# Altium PCB PCB.PcbDoc
Units mm, origin at the board's own origin, x right, y up, seen from the top; angles counter-clockwise.
Board outline 51.88 x 31.88 mm, 2 copper layers (Top Layer, Bottom Layer), stack 1.7 mm thick; 66 components, 69 nets, 300 pads, 159 vias.
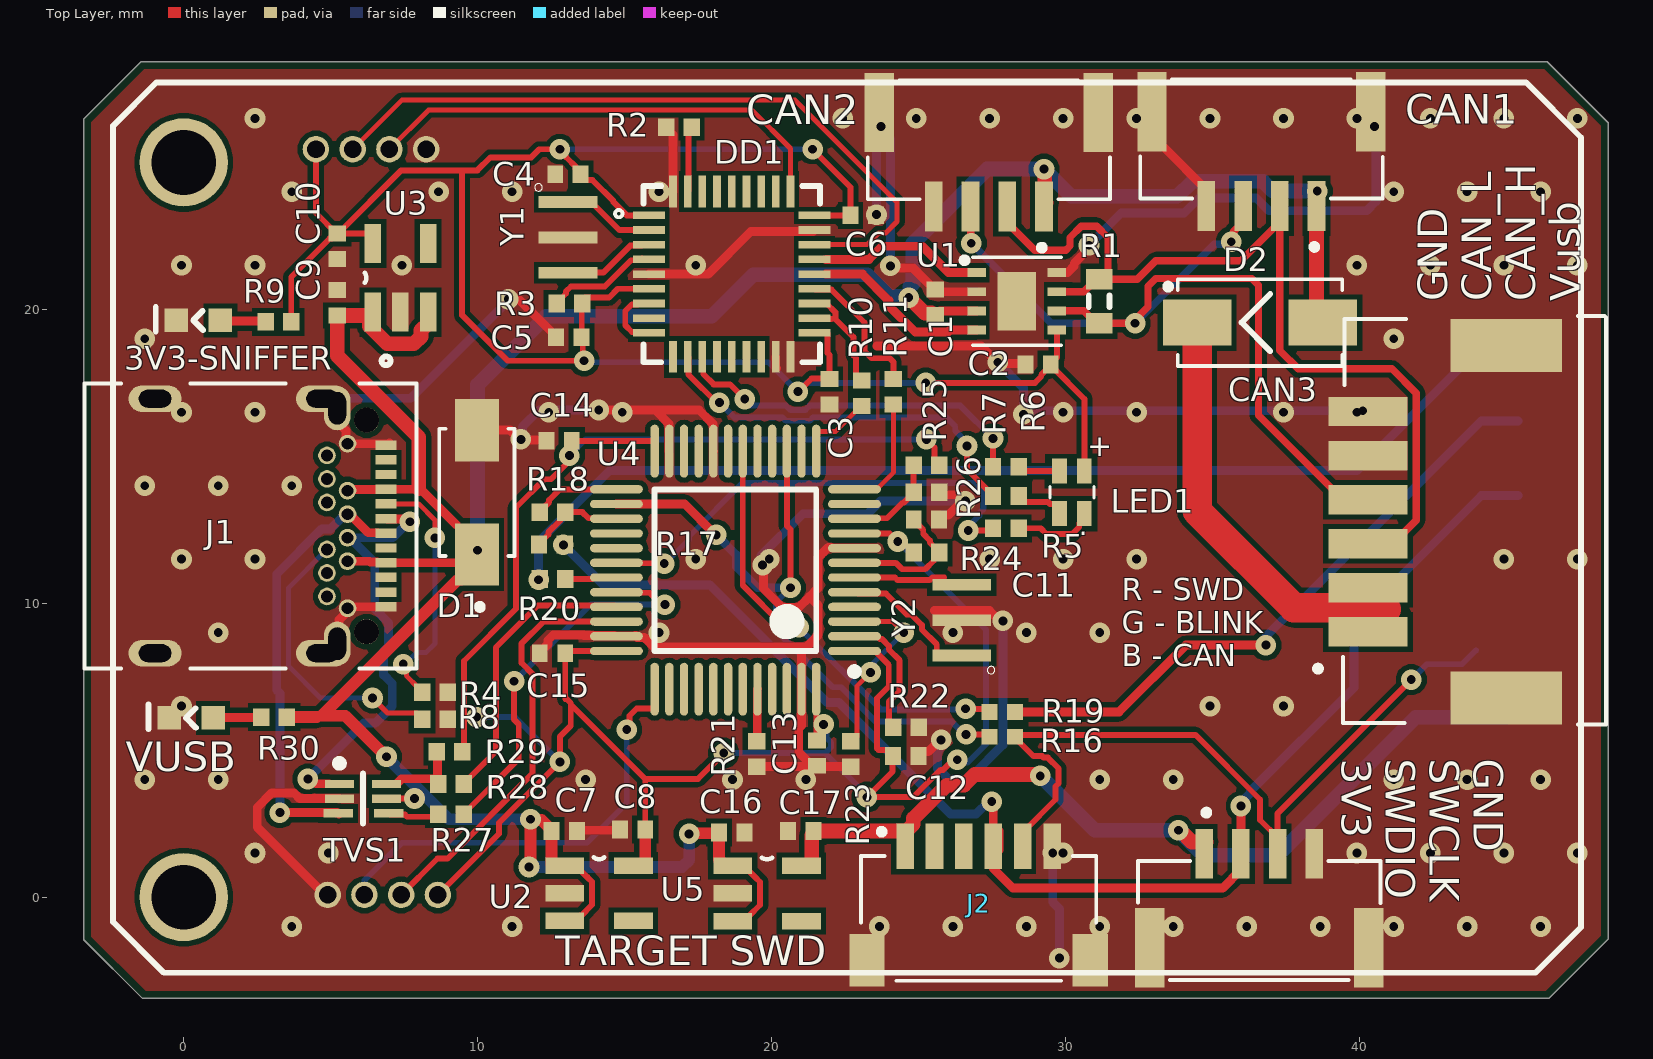
[diagram p0: Top Layer view]
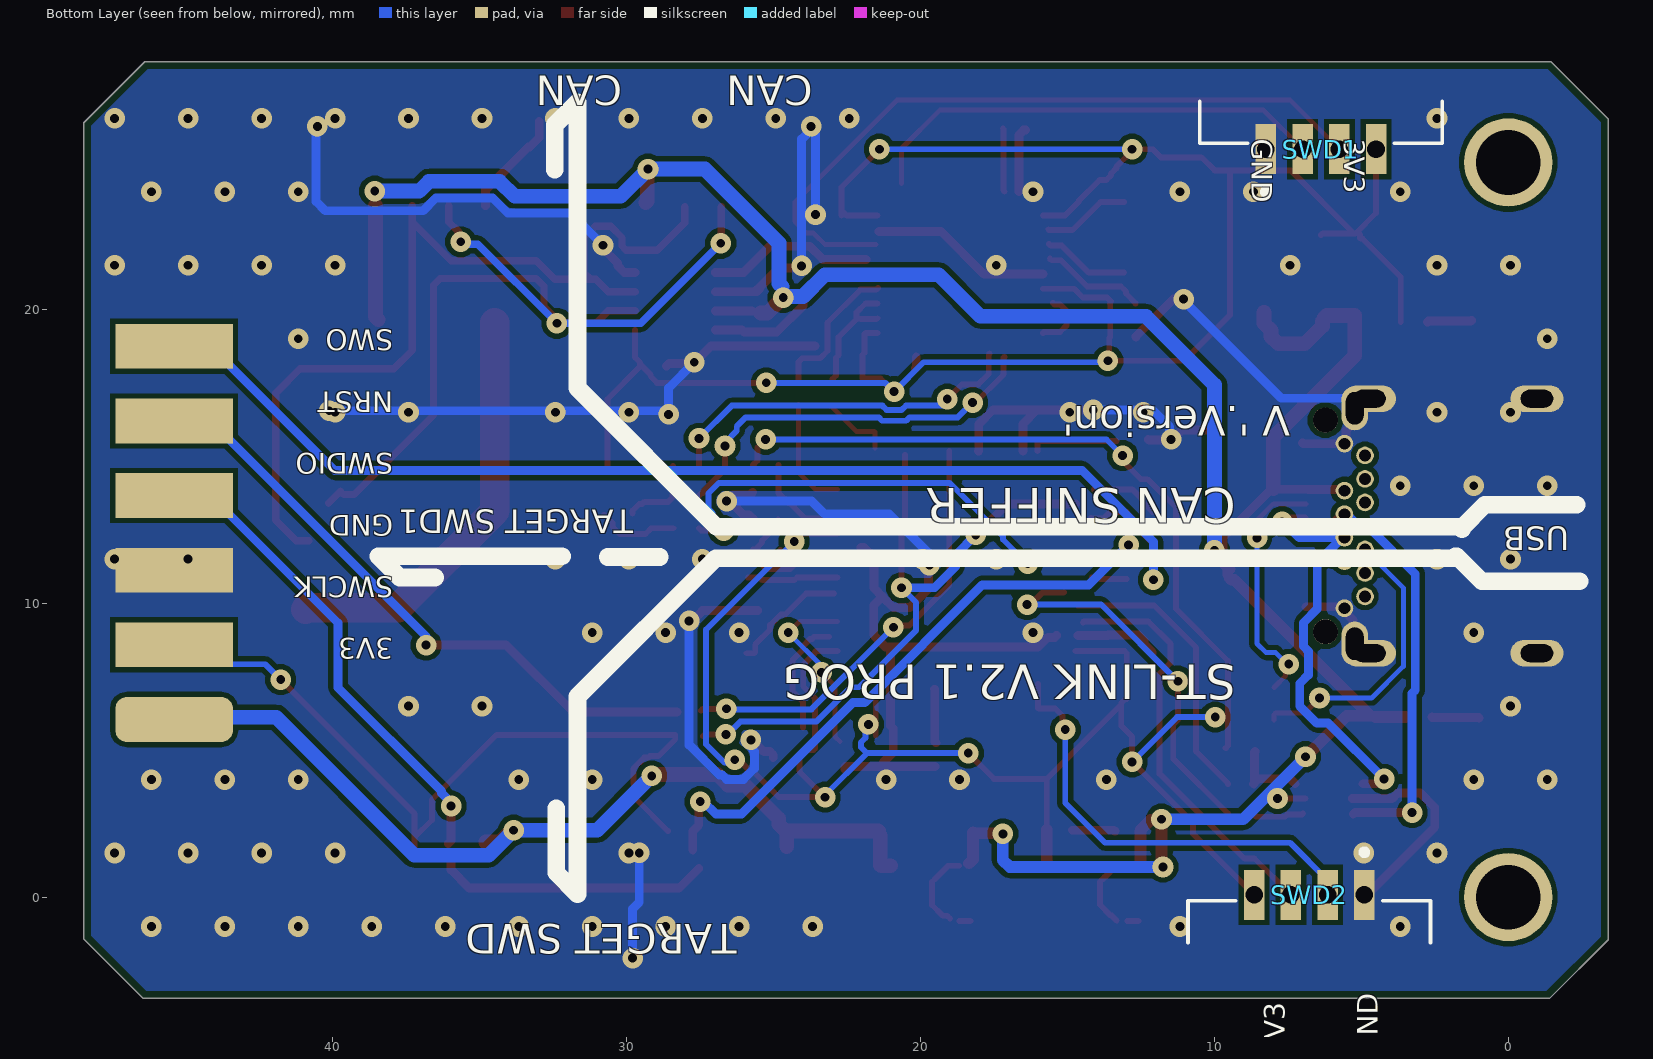
[diagram p1: Bottom Layer view, seen from below]
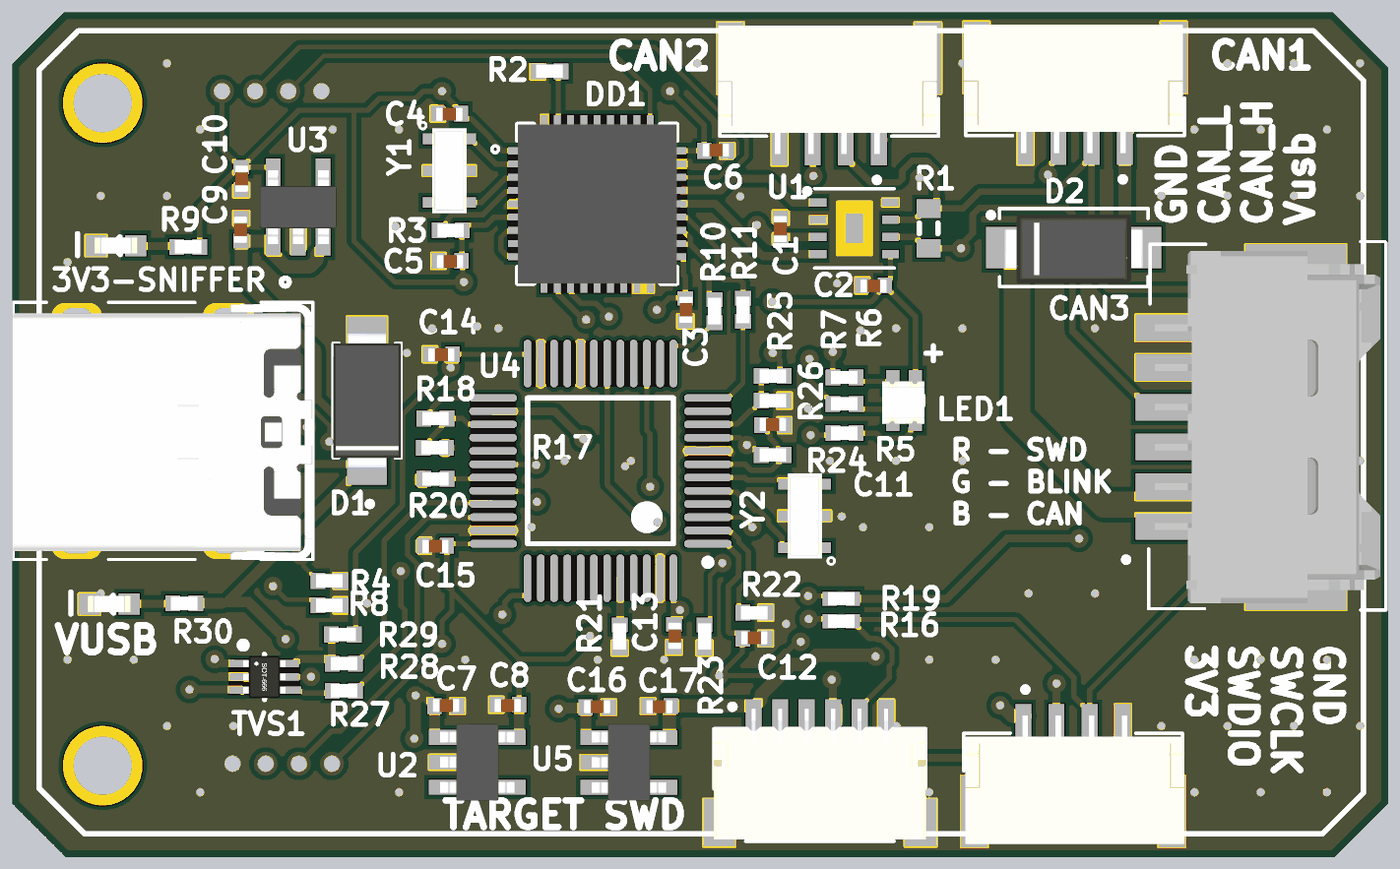
[diagram p2: 3D render of the assembled board from above, using the file's embedded part models]

## Layer stack, top to bottom
Top Solder: solder mask 0.01, Solder Resist, Dk 3.5
Top Layer: signal copper 0.05
Dielectric 1: dielectric 1.6, FR-4, Dk 4.8
Bottom Layer: signal copper 0.05
Bottom Solder: solder mask 0.01, Solder Resist, Dk 3.5

## Board outline
-3.4,-1.45 -3.4,26.475 -1.45,28.425 46.4,28.425 48.475,26.35 48.475,-1.425 46.45,-3.45 -1.4,-3.45

## Design rules (kind name [scope] priority, off if disabled: settings)
BoardOutlineClearance [All] p1: gap=0.25 ignorepadtopadclearanceinfootprint=FALSE
Clearance [All] p1: gap=0.17 ignorepadtopadclearanceinfootprint=FALSE
ComponentClearance [All] p1: gap=0.254 collisioncheckmode=3 verticalgap=2540 showdistances=FALSE
FanoutControl Fanout_SOIC [IsSOIC] p3: bgadir=Out bgaviamode=Closest fanoutstyle=Auto fanoutdirection=Alternating viagrid=0.025 // Fanout_SOIC (Default Rule)
FanoutControl Fanout_Small [(CompPinCount < 5)] p4: bgadir=Out bgaviamode=Closest fanoutstyle=Auto fanoutdirection=OutThenIn viagrid=0.025 // Fanout_Small (Default Rule)
FanoutControl Fanout_Default [All] p5: bgadir=In bgaviamode=Closest fanoutstyle=Auto fanoutdirection=Alternating viagrid=0.025 // Fanout_Default (Default Rule)
HoleSize [All] p1: absolutevalues=TRUE maxlimit=4.5 minlimit=0.3 maxpercent=80.000 minpercent=20.000
HoleToHoleClearance [All] p1: gap=0.4 allowstackedmicrovias=TRUE
MinimumSolderMaskSliver [All] p1: minsoldermaskwidth=0.22
PlaneClearance [All] p1: clearance=0.2
PlaneConnect [All] p1: planeconnectstyle=Relief reliefexpansion=0.5 reliefentries=4 reliefconductorwidth=0.2 reliefairgap=0.25
PolygonConnect PolygonConnect_1 [InNet('GND') vs IsStitchingVia and InNet('GND')] p1: connectstyle=Direct reliefconductorwidth=0.254 reliefentries=4 polygonreliefangle="90 Angle" airgapwidth=0.254
PolygonConnect [All] p2: connectstyle=Direct reliefconductorwidth=0.3 reliefentries=4 polygonreliefangle="90 Angle" airgapwidth=0.16
RoutingCorners [All] p1: cornerstyle=45-Degree minsetback=2.5 maxsetback=2.5
RoutingPriority [All] p1 off: routingpriority=0
RoutingVias [All] p1: holewidth=0.3 width=0.7 viastyle="Through Hole" minholewidth=0.3 minwidth=0.7 maxholewidth=0.8 maxwidth=1.2
SilkToSilkClearance [All] p1: silktosilkclearance=0
SilkToSolderMaskClearance [IsPad] p1: minsilkscreentomaskgap=0 clearancetoexposedcopper=TRUE
SolderMaskExpansion [All] p1: expansion=0.05 istentingtop=FALSE
Width [All] p1: maxlimit=5 minlimit=0.17 preferedwidth=0.3
17 further rules are at their usual default settings.

## Classes and differential pairs
component class STLINKv2DIY: C7 C8 C11 C12 C13 C14 C15 C16 C17 D1 iC iD J1 J2 R4 R8 R16 R17 R18 R19 R20 R21 R22 R23 R24 R25 R26 R27 R28 R29 R30 Rx SWD2 "TARGET SWD" "TARGET SWD1" TVS1 Tx U2 U4 U5 VUSB Y2
component class CAN_SNIFFER: 3V3-SNIFFER C1 C2 C3 C4 C5 C6 C9 C10 CAN1 CAN2 CAN3 D2 DD1 LED1 R1 R2 R3 R5 R6 R7 R9 R10 R11 SWD1 U1 U3 Y1

## Components (designator, comment, footprint, x,y, rotation, side; value= is the part's Value field where it differs from the comment)
3V3-SNIFFER "0603-LED-RED" *LEDM1608X80_LTE-C1906R-14(Primary) 0.5,19.625 r0 top value=RED
C1 "GCM155R71H104KE02D" CAPC1005X55N 25.575,20.25 r270 top value=0.1u
C2 "GCM155R71H104KE02D" CAPC1005X55N 29.075,18.125 r0 top value=0.1u
C3 "GCM155R71H104KE02D" CAPC1005X55N 21.975,17.2 r90 top value=0.1u
C4 "GCM155R71H104KE02D" CAPC1005X55N 13.075,24.6 r0 top value=0.1u
C5 "GCM155R71H104KE02D" CAPC1005X55N 13.1,19.05 r0 top value=0.1u
C6 "GCM155R71H104KE02D" CAPC1005X55N 23.125,23.2 r180 top value=0.1u
C7 "GCM155R71H104KE02D" CAPC1005X55N 12.95,2.25 r180 top value=0.1u
C8 "GCM155R71H104KE02D" CAPC1005X55N 15.275,2.3 r0 top value=0.1u
C9 "GCM155R71H104KE02D" CAPC1005X55N 5.225,20.225 r270 top value=0.1u
C10 "GCM155R71H104KE02D" CAPC1005X55N 5.225,22.15 r90 top value=0.1u
C11 "GCM155R71H104KE02D" CAPC1005X55N 25.275,12.85 r180 top value=0.1u
C12 "GCM155R71H104KE02D" CAPC1005X55N 24.575,4.8 r180 top value=0.1u
C13 "GCM155R71H104KE02D" CAPC1005X55N 21.55,4.9 r90 top value=0.1u
C14 "GCM155R71H104KE02D" CAPC1005X55N 12.775,15.525 r0 top value=0.1u
C15 "GCM155R71H104KE02D" CAPC1005X55N 12.55,8.3 r0 top value=0.1u
C16 "GCM155R71H104KE02D" CAPC1005X55N 18.65,2.2 r180 top value=0.1u
C17 "GCM155R71H104KE02D" CAPC1005X55N 21,2.25 r0 top value=0.1u
CAN1 "SM04B-GHS-TB(LF)(SN)-" JST_SM04B-GHS-TB(LF)(SN)- 36.675,25.8 r180 top
CAN2 "SM04B-GHS-TB(LF)(SN)-" JST_SM04B-GHS-TB(LF)(SN)- 27.4,25.775 r180 top
CAN3 "502585-0670" MOLEX_502585-0670 40.5,12.775 r90 top
D1 "SMAJ5.0" DIOM4325X250N 9.975,13.775 r90 top
D2 "SS16" *DIOM5227X250N_SS16(Primary) 36.625,19.55 r0 top
DD1 "STM32F103T8" *QFN50P600X600X100-37N 18.65,21.2 r0 top
J1 "UJ31-CH-31N-SMT-TR" CUI_UJ31-CH-31N-SMT-TR 6.885,15.38 r270 top
J2 "SM06B-SRSS-TB(LF)(SN)" JST_SM06B-SRSS-TB(LF)(SN) 27.05,1.725 r0 top
LED1 "LTST-C19HE1WT" LTST-C19HE1WT 30.225,13.775 r180 top
R1 "RC0603FR-07120RL" J1-0603 31.15,20.275 r90 top value=120
R2 "RC0402FR-0710KL" RESC1005X40N#1 16.85,26.2 r0 top value=10k
R3 "RC0402FR-0710KL" RESC1005X40N#1 13.125,20.2 r180 top value=10k
R4 "RC0402FR-075K1L" RESC1005X40N#1 8.55,6.975 r0 top value=5.1k
R5 "RC0402FR-07330RL" RESC1005X40N#1 27.975,12.55 r0 top value=330
R6 "RC0402FR-07330RL" RESC1005X40N#1 27.975,13.65 r0 top value=330
R7 "RC0402FR-07330RL" RESC1005X40N#1 27.975,14.65 r0 top value=330
R8 "RC0402FR-075K1L" RESC1005X40N#1 8.55,6.05 r0 top value=5.1k
R9 "RC0402FR-071KL" RESC1005X40N#1 3.225,19.575 r180 top value=1k
R10 "RC0402FR-0722RL" RESC1005X40N#2 23.075,17.15 r90 top value=22
R11 "RC0402FR-0722RL" RESC1005X40N#2 24.15,17.2 r90 top value=22
R16 "RC0402FR-0722RL" RESC1005X40N#3 27.85,5.45 r0 top value=22
R17 "RC0402FR-0722RL" RESC1005X40N#1 12.525,12 r0 top value=22
R18 "RC0402FR-07120RL" RESC1005X40N#1 12.55,13.1 r0 top value=120
R19 "RC0402FR-0722RL" RESC1005X40N#3 27.85,6.3 r0 top value=22
R20 "RC0402FR-0722RL" RESC1005X40N#1 12.55,10.825 r180 top value=22
R21 "RC0402FR-0710KL" RESC1005X40N#1 19.5,4.875 r270 top value=10k
R22 "RC0402FR-0710KL" RESC1005X40N#1 24.575,5.775 r0 top value=10k
R23 "RC0402FR-0710KL" RESC1005X40N#1 22.7,4.875 r90 top value=10k
R24 "RC0402FR-0710KL" RESC1005X40N#1 25.275,11.725 r0 top value=10k
R25 "RC0402FR-0710KL" RESC1005X40N#1 25.275,14.7 r180 top value=10k
R26 "RC0402FR-0710KL" RESC1005X40N#1 25.275,13.775 r180 top value=10k
R27 "RC0402FR-0722RL" RESC1005X40N#1 9.1,2.825 r0 top value=22
R28 "RC0402FR-0722RL" RESC1005X40N#1 9.1,3.85 r0 top value=22
R29 "RC0402FR-071K6L" RESC1005X40N#1 9.05,4.95 r0 top value=1.6k
R30 "RC0402FR-071KL" RESC1005X40N#1 3.075,6.125 r180 top value=1k
SWD1 "SM04B-GHS-TB(LF)(SN)-" JST_BM04B-GHS-holes 6.375,28.8 r0 bottom
SWD2 "SM04B-GHS-TB(LF)(SN)-" JST_BM04B-GHS-holes 6.775,-3.275 r180 bottom
"TARGET SWD" "SM04B-GHS-TB(LF)(SN)-" JST_SM04B-GHS-TB(LF)(SN)- 36.6,-0.8 r0 top
"TARGET SWD1" "PLS-6" "HDR Side 6 pin" 45.4,8.585 r90 bottom
TVS1 "USBLC6-2P6" SOT23127P600-8N 6.1,3.35 r0 top
U1 "TJA1042TK/3" SOT782-1 28.35,20.275 r270 top
U2 "SPX3819M5-L-3-3/TR" *SOT95P280X145-5N 14.134,0.131 r0 top value=3V3
U3 "SPX3819M5-L-3-3/TR" *SOT95P280X145-5N 7.375,21.075 r90 top value=3V3
U4 "STM32F103CBT6" STM-LQFP48_N 18.775,11.125 r180 top
U5 "SPX3819M5-L-3-3/TR" *SOT95P280X145-5N 19.85,0.125 r0 top value=3V3
VUSB "0603-LED-ORANGE" *LEDM1608X80_LTE-C1906R-14(Primary) 0.25,6.1 r0 top value=ORANGE
Y1 "CSTCE8M00G55-R0" *OSC_CSTCE8M00G55-R0 13.075,22.45 r270 top
Y2 "CSTCE8M00G55-R0" *OSC_CSTCE8M00G55-R0 26.475,9.425 r90 top

## Footprints (in the part's own frame and the unit in brackets; to place one, negate y for a bottom-side part, rotate by r counter-clockwise, add the part's x,y. Pads: shape width x height; smd on the part's side, far side on the other; paste and mask are expansions set on the pad)
*DIOM5227X250N_SS16(Primary) [mm]
  rect 2.33x1.56 smd: A(2.14,0) C(-2.14,0)
  silkscreen extent -3.22,-1.48 2.8,1.48, body extent -2.61,-1.35 2.61,1.25, height 2.2
*LEDM1608X80_LTE-C1906R-14(Primary) [mm]
  rect 0.8x0.8 smd: A(0.75,0) C(-0.75,0)
  silkscreen extent -1.45,-0.38 0.16,0.45, body extent -0.8,-0.3 0.8,0.3, height 1.15
*OSC_CSTCE8M00G55-R0 [mm]
  rect 0.4x2 smd: 1(-1.2,0) 2(0,0) 3(1.2,0)
  silkscreen extent -1.83,-1.13 -1.57,-0.87, body extent -1.6,-0.65 1.6,0.65, height 1
*QFN50P600X600X100-37N [mm]
  rect 1.08x0.26 smd: 1(-2.815,2) 2(-2.815,1.5) 3(-2.815,1) 4(-2.815,0.5) 5(-2.815,0) 6(-2.815,-0.5) 7(-2.815,-1) 8(-2.815,-1.5) 9(-2.815,-2) 19(2.815,-2) 20(2.815,-1.5) 21(2.815,-1) 22(2.815,-0.5) 23(2.815,0) 24(2.815,0.5) 25(2.815,1) 26(2.815,1.5) 27(2.815,2)
  rect 0.26x1.08 smd: 10(-2,-2.815) 11(-1.5,-2.815) 12(-1,-2.815) 13(-0.5,-2.815) 14(0,-2.815) 15(0.5,-2.815) 16(1,-2.815) 17(1.5,-2.815) 18(2,-2.815) 28(2,2.815) 29(1.5,2.815) 30(1,2.815) 31(0.5,2.815) 32(0,2.815) 33(-0.5,2.815) 34(-1,2.815) 35(-1.5,2.815) 36(-2,2.815)
  silkscreen extent -3.97,-3 3,3, body extent -3,-3 3,3, height 1
*SOT95P280X145-5N [mil]
  rect 52x22 smd: 1(-46,37) 2(-46,0) 3(-46,-37) 4(46,-37) 5(46,37)
  silkscreen extent -7,46 7,48, body extent -55,-57 55,57, height 57
CAPC1005X55N [mm]
  rect 0.54x0.6 smd: 1(-0.432,0) 2(0.432,0)
  body extent -0.5,-0.28 0.5,0.22, height 0.55
CUI_UJ31-CH-31N-SMT-TR [mm]
  rect 0.32x0.7 smd: A1(0,0) A2(0.5,0) A3(1,0) A4(1.5,0) A5(2,0) A6(2.5,0) A7(3,0) A8(3.5,0) A9(4,0) A10(4.5,0) A11(5,0) A12(5.5,0)
  round 0.6 hole 0.4: B1(5.55,-1.31) B2(5.15,-2.01) B3(4.35,-2.01) B4(3.95,-1.31) B5(3.55,-2.01) B6(3.15,-1.31) B7(2.35,-1.31) B8(1.95,-2.01) B9(1.55,-1.31) B10(1.15,-2.01) B11(0.35,-2.01) B12(-0.05,-1.31)
  oval 1.5x0.9 hole 0.6 slot 1.1 at 0 deg: SH1(-1.255,-1.66) SH2(6.755,-1.66)
  oval 0.9x1.8 hole 0.6 slot 1.1 at 90 deg: SH3(-1.58,-2.16) SH4(7.08,-2.16) SH5(-1.58,-7.86) SH6(7.08,-7.86)
  round 0.85 hole 0.85 unplated: ""(-0.85,-0.66) ""(6.35,-0.66)
  silkscreen extent -3.02,-10.26 7.6,1.04, body extent -2.06,-10.26 7.64,1.04, height 3.17
DIOM4325X250N [mm]
  rect 2.12x1.5 smd: A(2.115,0) C(-2.115,0)
  silkscreen extent -4,-1.28 2.16,1.28, body extent -2.57,-1.28 2.57,1.28, height 2.5
"HDR Side 6 pin" [mm]
  rrect50% 1.524x4 smd: 1(-2.54,0)
  rect 1.524x4 smd: 2(0,0) 3(2.54,0) 4(5.08,0) 5(7.62,0) 6(10.16,0)
J1-0603 [mm] "Chip Resistor, Body 1.6x0.8mm, IPC High Density"
  rect 0.7x0.9 smd: 1(-0.75,0) 2(0.75,0)
  silkscreen extent -0.2,-0.35 0.2,0.35, body extent -0.85,-0.48 0.85,0.48, height 0.9
JST_BM04B-GHS-holes [mm]
  rect 0.7x1.7 / inner rect 0.6x1.7 / far side round 0.9 hole 0.6 mask+0.1: 1(1.875,3.35) 2(0.625,3.35) 3(-0.625,3.35) 4(-1.875,3.35)
  silkscreen extent -4.13,1.72 4.13,4.9
JST_SM04B-GHS-TB(LF)(SN)- [mm]
  rect 0.6x1.7 smd: 1(-1.875,2.275) 2(-0.625,2.275) 3(0.625,2.275) 4(1.875,2.275)
  rect 1x2.7 smd: SH1(-3.725,-0.925) SH2(3.725,-0.925)
  silkscreen extent -4.13,-2.03 4.12,3.77, body extent -4.06,-2.16 4.19,2.69, height 4.35
JST_SM06B-SRSS-TB(LF)(SN) [mm]
  rect 0.6x1.55 smd: 1(-2.5,0) 2(-1.5,0) 3(-0.5,0) 4(0.5,0) 5(1.5,0) 6(2.5,0)
  rect 1.2x1.8 smd: S1(-3.8,-3.875) S2(3.8,-3.875)
  silkscreen extent -4,-4.57 4,0.6, body extent -4,-4.51 4,0.44, height 2.95
LTST-C19HE1WT [mm]
  rect 0.5x0.85 smd mask+0.05: 1(-0.425,0.725) 2(0.425,0.725) 3(0.425,-0.725) 4(-0.425,-0.725)
  silkscreen extent -0.75,-0.2 0.75,0.2, body extent -0.77,-0.72 0.83,0.88, height 0.35
MOLEX_502585-0670 [mm]
  rect 1x2.7 smd: 1(-3.75,0.2) 2(-2.25,0.2) 3(-0.75,0.2) 4(0.75,0.2) 5(2.25,0.2) 6(3.75,0.2)
  rect 1.8x3.8 smd: P1(-6,-4.5) P2(6,-4.5)
  silkscreen extent -6.9,-7.9 7,2, body extent -6.65,-7.68 6.65,0.82, height 6.41
RESC1005X40N#1 [mm]
  rect 0.56x0.6 smd: 1(-0.435,0) 2(0.435,0)
  body extent -0.5,-0.25 0.5,0.25, height 0.41
RESC1005X40N#2 [mm]
  rect 0.55x0.6 smd: 1(-0.435,0) 2(0.435,0)
  body extent -0.5,-0.25 0.5,0.25, height 0.41
RESC1005X40N#3 [mm]
  rect 0.54x0.53 smd: 1(-0.435,0) 2(0.435,0)
  body extent -0.5,-0.25 0.5,0.25, height 0.41
SOT782-1 [mm]
  rect 0.3x0.625 smd: 1(-0.975,-1.362) 2(-0.325,-1.362) 3(0.325,-1.362) 4(0.975,-1.362) 5(0.975,1.363) 6(0.325,1.363) 7(-0.325,1.363) 8(-0.975,1.363)
  rect 2x1.3 smd paste-2: P$9(0,0)
  silkscreen extent -1.5,-1.88 1.5,1.5, body extent -1.52,-1.52 1.52,1.52, height 0.85
SOT23127P600-8N [mm]
  rect 1x0.284 smd: 1(-0.8,0.5) 2(-0.8,0) 3(-0.843,-0.502) 4(0.884,-0.502) 5(0.8,0) 6(0.8,0.5)
  silkscreen extent -0.92,-0.85 0,1.32, body extent -0.8,-0.8 0.8,0.8, height 0.6
STM-LQFP48_N [mm] "QFP, 48-Leads, Body 7x7mm, Pitch 0.5mm, IPC Medium Density"
  oval 1.8x0.284 smd: 1(-4.05,2.75) 2(-4.05,2.25) 3(-4.05,1.75) 4(-4.05,1.25) 5(-4.05,0.75) 6(-4.05,0.25) 7(-4.05,-0.25) 8(-4.05,-0.75) 9(-4.05,-1.25) 10(-4.05,-1.75) 11(-4.05,-2.25) 12(-4.05,-2.75) 25(4.05,-2.75) 26(4.05,-2.25) 27(4.05,-1.75) 28(4.05,-1.25) 29(4.05,-0.75) 30(4.05,-0.25) 31(4.05,0.25) 32(4.05,0.75) 33(4.05,1.25) 34(4.05,1.75) 35(4.05,2.25) 36(4.05,2.75)
  oval 0.284x1.8 smd: 13(-2.75,-4.05) 14(-2.25,-4.05) 15(-1.75,-4.05) 16(-1.25,-4.05) 17(-0.75,-4.05) 18(-0.25,-4.05) 19(0.25,-4.05) 20(0.75,-4.05) 21(1.25,-4.05) 22(1.75,-4.05) 23(2.25,-4.05) 24(2.75,-4.05) 37(2.75,4.05) 38(2.25,4.05) 39(1.75,4.05) 40(1.25,4.05) 41(0.75,4.05) 42(0.25,4.05) 43(-0.25,4.05) 44(-0.75,4.05) 45(-1.25,4.05) 46(-1.75,4.05) 47(-2.25,4.05) 48(-2.75,4.05)
  silkscreen extent -4.18,-2.75 2.75,3.57, body extent -3.5,-3.5 3.5,3.5, height 1.6

## Part data
3V3-SNIFFER: "Red 620nm LED Indication - Discrete 2.2V 0603 (1608 Metric)", Package="0603 Lite-On", MP=LTST-C194KRKT, SnapEDA_Link=https://www.snapeda.com/parts/LTE-C1906R-14/Lite-On%20Inc./view-part/?ref=snap, Type=SMD
C1 C2 C3 C4 C5 C6 C7 C8 C9 C10 C11 C12 C13 C14 C15 C16 C17: "GCM155R71H104KE02D, Чип 0402 X7R 0.1uF +10% 50V,Конденсатор", Package=0402, ChipDip_Link=https://www.chipdip.ru/product/gcm155r71h104ke02d-murata, MF=Murata, MP=GCM155R71H104KE02D, SnapEDA_Link=https://www.snapeda.com/parts/GCM155R71H104KE02D/Murata%20Electronics%20North%20America/view-part/597463/?ref=snap, Type=SMD
CAN1 CAN2 "TARGET SWD": "Connector Header Surface Mount, Right Angle 4 position 0.049 _1.25mm_", Package=None, ChipDip_Link=https://www.chipdip.ru/product/sm04b-ghs-tb-lf-sn-gh-1.25mm-header-side-ent, HelpURL=http://www.farnell.com/datasheets/2082975.pdf, MF="JST Sales", MP=SM04B-GHS-TB(LF)(SN), SnapEDA_Link=https://www.snapeda.com/parts/SM04B-GHS-TB%28LF%29%28SN%29-/JST%20Sales%20America%20Inc./view-part/2759740/?ref=snap, System=Connector, Type=SMD
CAN3: "1.50mm Pitch, CLIK-Mate PCB Receptacle, Single Row, Surface Mount, Right-Angle, Tin Plating, Positive Lock, 6 Circuits, Natural", Package=None, MF=Molex, MP=502585-0670, SnapEDA_Link=https://www.snapeda.com/parts/502494-0670/Molex/view-part/?ref=snap, System=Connector, Type=SMD
D1: "400W, 6.9V, 10%, Unidirectional, TVS", Package="DO-214AC-2 Taiwan Semiconductor", MF="Taiwan Semiconductor", MP=SMAJ5.0, SnapEDA_Link=https://www.snapeda.com/parts/SMAJ5.0/Taiwan+Semiconductor/view-part/?ref=snap, Type=SMD
D2: "Diode Schottky 60V 1A Surface Mount SMA", Package=SMA-2, ChipDip_Link=https://www.chipdip.ru/product/ss16, Instructions=DNP, MP=SS16, SnapEDA_Link=https://www.snapeda.com/parts/SS16/ON%20Semiconductor/view-part/?ref=search&t=ss16, Type=SMD
DD1: "STM32F103T8U6, Микроконтроллер 32BIT ARM 64K FLASH [VFQFPN-36]", Package=VFQFPN-36, ChipDip_Link=https://www.chipdip.ru/product/stm32f103t8u6-2, HelpURL=http://www.st.com/stonline/products/literature/ds/13587.pdf, MF=STM, MP=STM32F103T8U6, SnapEDA_Link=https://www.snapeda.com/parts/STM32F103T8U6TR/STMicroelectronics/view-part/?ref=search&t=STM32F103T8U6, Type=SMD
J1: "Type C, USB 3.1 Gen 2, 5 A, Right Angle, Surface Mount _SMT_, USB Receptacle", Package=None, ChipDip_Link=https://www.chipdip.ru/product1/8002862225, HelpURL=https://www.chipdip.ru/product1/8002862225, MF="CUI Devices", MP=UJ31-CH-31N-SMT-TR, SnapEDA_Link=https://www.snapeda.com/parts/UJ31-CH-31N-SMT-TR/CUI%20Devices/view-part/2776725/?ref=snap, System=Connector, Type=SMT
J2: "Connector Header Surface Mount, Right Angle 6 position 0.039 _1.00mm_", Package=None, MF="JST Sales", MP=SM06B-SRSS-TB_LF__SN_, SnapEDA_Link=https://www.snapeda.com/parts/SM06B-SRSS-TB%28LF%29%28SN%29/JST%20Sales%20America%20Inc./view-part/554386/?ref=snap, Type=SMD
LED1: library part RGB_LED_5MM, "Blue/Green/Red", ChipDip_Link=https://www.chipdip.ru/product1/8003387462, HelpURL=https://static.chipdip.ru/lib/039/DOC013039662.pdf, MP=LTST-C19HE1WT, Type=SMD
R1: "120 Ohms 1 0.1 W 1 10 W Chip Resistor 0603 1608 Metric Thick Film", Package=R0603, ChipDip_Link=https://www.chipdip.ru/product0/9000079618, HelpURL=https://www.chipdip.ru/product0/9000079618, MF="Yageo or NXP", MP=RC0603FR-07120RL, Pacage Metric=1608, SnapEDA_Link=https://www.snapeda.com/parts/RC0603FR-07120RL/Yageo/view-part/?ref=search&t=RC0603FR-07120RL, Type=SMD
R2 R3 R21 R22 R23 R24 R25 R26: "0.062Вт 0402 10 кОм, 1%, Чип резистор (SMD)", Package=RC0402, ChipDip_Link=https://www.chipdip.ru/product0/9000189640, HelpURL=https://www.chipdip.ru/product0/9000189640, MF="Yageo or NXP", MP=RC0402FR-0710KL, SnapEDA_Link=https://www.snapeda.com/parts/CRGCQ0402F10K/TE%20Connectivity/view-part/3186991/?ref=search&t=0402%2010k, Type=SMD
R4 R8: library part RC0402FR-054K1L, "0.062Вт 0402 5.1 кОм, 1%, Чип резистор (SMD)", Package=RC0402, ChipDip_Link=https://www.chipdip.ru/product0/9000189640, HelpURL=https://www.chipdip.ru/product0/9000189640, MF="Yageo or NXP", MP=RC0402FR-075K1L, SnapEDA_Link=https://www.snapeda.com/parts/CRGCQ0402F10K/TE%20Connectivity/view-part/3186991/?ref=search&t=0402%2010k, Type=SMD
R5 R6 R7: "0.062Вт 0402 330 Ом, 1%, Чип резистор (SMD)", Package=RC0402, ChipDip_Link=https://www.chipdip.ru/product0/9000189640, HelpURL=https://www.chipdip.ru/product0/9000189640, MF="Yageo or NXP", MP=RC0402FR-07330RL, Pacage Metric=1005, SnapEDA_Link=https://www.snapeda.com/parts/CRGCQ0402F10K/TE%20Connectivity/view-part/3186991/?ref=search&t=0402%2010k, Type=SMD
R9 R30: "0.062Вт 0402 1 кОм, 1%, Чип резистор (SMD)", Package=RC0402, ChipDip_Link=https://www.chipdip.ru/product0/9000189640, HelpURL=https://www.chipdip.ru/product0/9000189640, MF="Yageo or NXP", MP=RC0402FR-071KL, SnapEDA_Link=https://www.snapeda.com/parts/CRGCQ0402F10K/TE%20Connectivity/view-part/3186991/?ref=search&t=0402%2010k, Type=SMD
R10 R11 R16 R17 R19 R20 R27 R28: "0.062Вт 0402 22 Ом, 1%, Чип резистор (SMD)", Package=RC0402, ChipDip_Link=https://www.chipdip.ru/product0/9000189640, HelpURL=https://www.chipdip.ru/product0/9000189640, MF="Yageo or NXP", MP=RC0402FR-0722RL, SnapEDA_Link=https://www.snapeda.com/parts/CRGCQ0402F10K/TE%20Connectivity/view-part/3186991/?ref=search&t=0402%2010k, Type=SMD
R18: "0.062Вт 0402 120 Ом, 1%, Чип резистор (SMD)", Package=RC0402, ChipDip_Link=https://www.chipdip.ru/product0/9000189640, HelpURL=https://www.chipdip.ru/product0/9000189640, MF="Yageo or NXP", MP=RC0402FR-07120RL, SnapEDA_Link=https://www.snapeda.com/parts/CRGCQ0402F10K/TE%20Connectivity/view-part/3186991/?ref=search&t=0402%2010k, Type=SMD
R29: "0.062Вт 0402 1.6 кОм, 1%, Чип резистор (SMD)", Package=RC0402, ChipDip_Link=https://www.chipdip.ru/product0/9000189640, HelpURL=https://www.chipdip.ru/product0/9000189640, MF="Yageo or NXP", MP=RC0402FR-071K6L, SnapEDA_Link=https://www.snapeda.com/parts/CRGCQ0402F10K/TE%20Connectivity/view-part/3186991/?ref=search&t=0402%2010k, Type=SMD
SWD1 SWD2: library part "SWD SM04B-GHS-TB(LF)(SN)-", "Conn Shrouded Header HDR 4 POS 1.25mm Solder ST SMD Reel", Package=None, Instructions=DNP, MF="JST Sales", MP=SM04B-GHS-TB(LF)(SN), SnapEDA_Link=https://www.snapeda.com/parts/BM04B-GHS-TBT%28LF%29%28SN%29%28N%29/JST%20Sales%20America%20Inc./view-part/?ref=snap, System=Connector, Type=SMD
"TARGET SWD1": "PLS-6 (DS1021-1x6), Вилка штыревая 2.54мм 1x6 прямая тип1", ChipDip_Link=https://www.chipdip.ru/product/pls-6, Instructions=DNP, MP=PLS-6, System=Connector, Type=SMD
TVS1: "17V Clamp 5A (8/20µs) Ipp Tvs Diode Surface Mount SOT-666", Package=SOT-666, ChipDip_Link=https://www.chipdip.ru/product/usblc6-2p6-2, HelpURL=https://static.chipdip.ru/lib/093/DOC001093117.pdf, MF=STM, MP=USBLC6-2P6, SnapEDA_Link=https://www.snapeda.com/parts/USBLC6-2P6/STMicroelectronics/view-part/?ref=search&t=USBLC6-2P6, Type=SMD
U1: library part TJA1042, "1/1 Transceiver Half CANbus 8-SO", Package="VDFN-8 NXP USA", ChipDip_Link=https://www.chipdip.ru/product1/8002840332, HelpURL=https://static.chipdip.ru/lib/583/DOC001583059.pdf, MF="NXP USA", MP=TJA1042TK/3, SnapEDA_Link=https://www.snapeda.com/parts/TJA1042/NXP%20USA%20Inc./view-part/900919/?ref=snap, Type=SMD
U2 U3 U5: "Low Dropout Voltage Regulator, Adjustable 0.5A, В±1%, 2.5 to 16 Vin, 5-Pin SOT-23", Package="SOT-23-5 Exar", ChipDip_Link=https://www.chipdip.ru/product1/8003455237, HelpURL=http://www.farnell.com/datasheets/2614478.pdf, MF="MaxLinear, Inc.", MP=SPX3819M5-L-3-3/TR, SnapEDA_Link=https://www.snapeda.com/parts/SPX3819M5-L/MaxLinear%2C%20Inc./view-part/?ref=snap, Type=SMD
U4: "ARM® Cortex®-M3 STM32F1 Microcontroller IC 32-Bit 72MHz 128KB (128K x 8) FLASH", Package=LQFP-48, ChipDip_Link=https://www.chipdip.ru/product/stm32f103cbt6, HelpURL=https://static.chipdip.ru/lib/235/DOC000235733.pdf, Instructions="STM32F103CBT6 - should be B letter not 8", MF=STM, MP=STM32F103CBT6, SnapEDA_Link=https://www.snapeda.com/parts/STM32F103CBT6/STMicroelectronics/view-part/?ref=search&t=STM32F103CBT6, Type=SMD
VUSB: "Orange 605nm LED Indication - Discrete 2.2V 0603 (1608 Metric)", Package="0603 Lite-On", MP=LTST-C194KFKT, SnapEDA_Link=https://www.snapeda.com/parts/SML-D12D1WT86/Rohm/view-part/?ref=search&t=0603%20LED%20orange, Type=SMD
Y1 Y2: "Ceramic Resonator 8MHz ??0.5% _Tol_ ??0.2% _Stability_ 33pF 40Ohm 3-Pin CSMD T/R", Package="SMD-3 Murata", ChipDip_Link=https://www.chipdip.ru/product1/8001783721, HelpURL=https://www.murata.com/en-eu/api/pdfdownloadapi?cate=&partno=CSTCE8M00G55-R0, MF=Murata, MP=CSTCE8M00G55-R0, SnapEDA_Link=https://www.snapeda.com/parts/CSTCE8M00G55-R0/Murata%20Electronics%20North%20America/view-part/?ref=snap, Type=SMD

## Free pads (board coordinates)
  round 3 hole 2.2: ""(0,0) ""(0,25)

## Via types
v1: diameter 0.7, hole 0.3, Top Layer to Bottom Layer, tented both sides, 159 vias

## Nets (pads, with @x,y where several pads share a name; then routed paths per layer and width w, separated by ;. In a path a pad name is that pad's centre, name@x,y a point inside that pad or via, vN(x,y) a via of type N, cw(c..) or ccw(c..) an arc to the next point about the centre after c; other vN are vias at no path point)
3V3-OUT: "TARGET SWD1.1" "TARGET SWD.1" C17.2 J2.1 U5.5 | length 30.6
  Top Layer w0.5: U5.5 21.34,1.065 21.369,1.094 C17.2@21.369,2.094 ; C17.2 24.525,2.25 24.563,2.213 J2.1@24.575,2.2 ; J2.1 24.55,2.2 24.83,2.48 24.83,2.674 25.966,3.81 26.551,3.81 26.916,4.175 29.1,4.175 v1(29.15,4.125) ; v1(33.85,2.275) 33.904,2.275 34.304,1.875 34.8,1.875
  Bottom Layer w0.5: v1(29.15,4.125) 31,2.275 v1(33.85,2.275) 34.7,1.425 37.225,1.425 41.925,6.125 45,6.125
3V3-PROG: C8.2 C12.2 C13.2 C14.2 C15.2 R24.1 R25.1 R29.2 SWD2.4 U2.5 U4.1 U4.9 U4.24 U4.36 U4.48 | length 83
  Top Layer w0.2: SWD2.4@8.7,0.125 10.729,2.154 10.729,2.529 v1(12.8,4.6) 12.8,5.461 13.17,5.831 13.17,6.557 ; R29.2@9.625,5.075 9.61,5.075 9.535,5.15 9.535,6.075 ; v1(9.975,6.125) 9.925,6.075 9.535,6.075 ; 12.982,6.745 C15.2 ; 13.05,6.725 13.17,6.605 13.17,6.557 ; C15.2@13.05,8.375 U4.36 ; v1@13.207,14.925 12.5,14.218 12.272,14.218 11.311,13.258 11.311,9.811 9.535,8.035 9.535,6.075 ; C14.2@13.325,15.525 15.986,15.525 16.025,15.486 U4.24 ; C8.2@15.707,2.318 15.707,4.02 ; v1(18.375,4.9) 17.495,4.02 15.707,4.02 ; C13.2@21.525,5.5 U4.48 ; U4.1 23.56,8.375 23.599,8.336 23.599,8.297 23.992,7.904 23.992,7.167 23.59,6.765 23.59,5.06 23.65,5 23.973,5 24.125,4.848 24.125,4.275 v1(23.25,3.4) 24.821,3.4 25.751,4.33 25.846,4.33 26.19,4.674 v1(26.326,4.674) ; U4.9 24.025,12.375 v1(24.3,12.1) ; R24.1@24.775,11.625 R24.1@24.775,11.81 ; v1(25.275,15.575) 25.55,15.3 25.55,14.86 R25.1 ; 13.17,6.557 15.707,4.02
  Top Layer w0.4: U2.5@15.675,1.15 15.707,1.182 C8.2
  Bottom Layer w0.2: v1(9.975,6.125) 11.275,6.125 v1(12.8,4.6) ; v1(13.125,15.025) 13.675,15.575 v1(25.275,15.575) ; v1(18.375,4.9) 21.825,4.9 ; v1(21.775,5.875) 21.871,5.779 21.871,5.419 22.024,5.265 22.024,5.099 21.825,4.9 ; v1(23.25,3.4) 23.25,3.475 21.825,4.9 ; v1(24.3,12.1) 27.3,9.1 27.3,5.2 26.675,4.575 26.671,4.579 26.421,4.579 v1(26.326,4.674)
3V3-SNIFFER: C2.2 C3.2 C4.2 C5.2 C6.2 C10.2 DD1.1 DD1.6 DD1.19 DD1.27 LED1.4 R3.1 R9.1 SWD1.4 U1.5 U3.5 | length 72.4
  Top Layer w0.2: R9.1 3.66,21.105 4.967,22.412 5.025,22.412 5.05,22.437 C10.2@5.05,22.55 ; SWD1.4 4.5,23.277 C10.2@5.202,22.575 ; C10.2 C10.2@5.255,22.582 ; U3.5@6.375,22.525 6.318,22.582 C10.2@5.255,22.582 ; 9.475,24.725 9.475,19.8 11.025,18.25 v1(13.625,18.25) 13.579,18.296 C5.2@13.579,19.029 ; 11.825,25.17 10.434,25.17 9.994,24.73 7.403,24.73 C10.2@5.255,22.582 ; 11.825,25.175 12.1,25.45 v1(12.8,25.45) ; 13.025,25.17 13.337,24.858 13.337,24.8 13.512,24.625 13.525,24.625 13.525,24.552 13.677,24.4 13.907,24.4 14.631,23.676 14.631,23.644 15.075,23.2 DD1.1 ; R3.1@13.525,20.275 13.65,20.4 14.472,20.4 14.771,20.7 DD1.6 ; C5.2@13.55,19.05 13.546,19.054 13.546,20.186 R3.1 ; v1(20.9,17.2) 20.919,17.2 21.369,17.65 21.975,17.65 21.975,18.451 21.905,18.521 21.905,19.17 21.875,19.2 DD1.19 ; v1(21.4,25.45) 22.693,24.157 C6.2 ; DD1.27 22.525,23.2 C6.2@22.609,23.284 ; v1(25.25,17.5) 28.97,17.5 29.183,17.713 29.183,17.771 29.507,18.095 C2.2 ; C2.2@29.55,18.125 29.55,18.198 29.713,18.361 U1.5 ; C2.2@29.575,18.05 29.575,18.027 30.65,16.952 LED1.4
  Bottom Layer w0.2: v1(12.8,25.45) v1(21.4,25.45) ; v1(13.625,18.25) 13.675,18.2 19.9,18.2 v1(20.9,17.2) 21.2,17.5 v1(25.25,17.5)
ADC_5V: DD1.8
BOOT0: DD1.35 R2.2 | length 2.2
  Top Layer w0.2: DD1.35 17.18,24.045 17.18,26.13 R2.2@17.2,26.15
CAN_H: CAN1.2 CAN2.2 CAN3.3 R1.2 U1.7 | length 31
  Top Layer w0.25: CAN2.2 28.025,22.95 28.962,22.013 30.015,22.013 30.161,22.159 30.161,22.448 30.539,22.826 31.073,22.826 31.451,22.448 31.451,21.25 R1.2@31.226,21.025 ; U1.7 30.625,20.6 31.05,21.025 R1.2@31.226,21.025 ; CAN1.2 CAN1.2@37.3,22.975 ; CAN3.3@40.825,12.125 41.25,12.125 41.945,12.82 41.945,17.147 41.117,17.975 37.928,17.975 37.3,18.603 CAN1.2@37.3,22.975 ; R1.2@31.226,21.025 32.454,21.025 33.084,21.655 35.98,21.655 CAN1.2@37.3,22.975
CAN_L: CAN1.3 CAN2.3 CAN3.4 R1.1 U1.6 | length 31.2
  Top Layer w0.25: CAN2.3 26.788,23.488 26.788,22.263 v1(26.8,22.25) ; U1.6 30.625,19.95 31.025,19.55 R1.1@31.075,19.55 ; R1.1@31.125,19.525 v1(32.375,19.525) 32.375,19.647 32.815,20.086 32.815,20.792 33.073,21.05 36.35,21.05 36.575,20.825 36.575,16.4 39.275,13.7 CAN3.4@39.625,13.7 ; v1(35.65,22.3) 35.736,22.386 35.736,22.661 36.05,22.975 CAN1.3 ; CAN3.4@39.737,13.813 CAN3.4@40.15,13.4
  Bottom Layer w0.25: v1(26.8,22.25) 29.525,19.525 32.425,19.525 32.425,19.575 35.064,22.214 35.564,22.214 v1(35.65,22.3)
CAN_RXD: DD1.23 U1.4 | length 6.1
  Top Layer w0.3: DD1.23@21.855,21.2 23.098,21.2 23.998,20.299 23.998,20.129 24.899,19.228 26.008,19.228 26.08,19.3 U1.4
CAN_TXD: DD1.24 U1.1 | length 5.7
  Top Layer w0.3: DD1.24@21.855,21.7 23.32,21.7 23.77,22.15 25.129,22.15 26.03,21.25 U1.1
D+: J1.A6 J1.B6 TVS1.1 | length 14
  Top Layer w0.3: v1@4.496,3.858 TVS1.1@4.95,3.858 ; J1.A6@6.925,12.875 6.93,12.87 7.496,12.87 7.591,12.775 v1(7.699,12.775)
  Bottom Layer w0.3: v1(4.225,4.02) 6.127,5.922 6.52,5.922 7.095,6.497 7.095,7.27 6.803,7.562 6.803,8.367 6.97,8.534 6.97,9.339 6.5,9.809 6.5,11.382 J1.B6@5.652,12.23 ; J1.B6 J1.B6@5.652,12.23 ; v1(7.699,12.775) 7.658,12.775 7.113,12.23 J1.B6@5.652,12.23
D-: J1.A7 J1.B7 TVS1.3 | length 14.7
  Top Layer w0.3: v1(3.275,2.875) 5.225,2.875 TVS1.3@5.275,2.825 ; J1.B7 5.652,13.03 6.282,12.4 J1.A7@6.6,12.4
  Bottom Layer w0.3: v1(3.275,2.875) 3.275,6.935 3.165,7.045 3.165,10.997 4.698,12.53 4.998,12.53 5.498,13.03 J1.B7
DEBUG_RX: J2.3
DEBUG_TX: J2.2
GND: 3V3-SNIFFER.C "TARGET SWD1.3" "TARGET SWD.4" "TARGET SWD.SH1" "TARGET SWD.SH2" C1.1 C2.1 C3.1 C4.1 C5.1 C6.1 C7.1 C8.1 C9.1 C10.1 C11.1 C12.1 C13.1 C14.1 C15.1 C16.1 C17.1 CAN1.4 CAN1.SH1 CAN1.SH2 CAN2.4 CAN2.SH1 CAN2.SH2 CAN3.5 CAN3.6 CAN3.P1 CAN3.P2 D1.A DD1.5 DD1.17 DD1.18 DD1.26 DD1.36 J1.A1 J1.A12 J1.B1 J1.B12 J1.SH1 J1.SH2 J1.SH3 J1.SH4 J1.SH5 J1.SH6 J2.6 J2.S1 J2.S2 R2.1 R4.2 R8.2 R21.2 R22.2 R23.1 R26.1 SWD1.1 SWD2.1 TVS1.2 U1.2 U1.8 U1.P$9 U2.2 U3.2 U4.8 U4.20 U4.23 U4.35 U4.47 U5.2 VUSB.C Y1.2 Y2.2 | length 142.7
  Top Layer w0.3: SWD2.1@4.825,0.075 4.8,0.075 2.5,2.375 2.5,3.048 2.997,3.545 3.752,3.545 3.947,3.35 TVS1.2 ; J1.SH3@5.15,16.55 5.15,16.248 5.518,15.88 5.518,15.487 J1.B12 6.98,15.43 J1.A1@7,15.45 ; J1.SH4@5.3,8.5 5.29,8.51 5.29,9.44 5.73,9.88 J1.A12 ; D1.A 11.114,15.89 11.379,15.625 v1@11.4,15.625 ; v1(11.05,20.35) 11.398,20.35 12.668,19.08 C5.1 ; v1(11.475,15.575) 11.5,15.55 12.225,15.55 C14.1@12.25,15.575 ; C15.1 12.118,8.33 12.392,8.604 12.392,8.733 12.579,8.92 13.605,8.92 13.625,8.9 U4.35@14.65,8.9 ; C7.1 13.407,2.275 C8.1@14.825,2.275 ; v1(14.125,16.575) 16.036,16.575 ; U4.35@15.375,8.9 15.438,8.837 15.674,8.837 15.997,8.515 20.975,8.515 ; DD1.5 17.85,21.2 19.3,22.65 DD1.26@21.425,22.65 ; R2.1@16.425,26.1 16.495,26.1 16.65,25.945 DD1.36 ; U4.23 16.517,15.183 16.517,16.094 16.036,16.575 ; U4.20 18.017,15.183 18.017,16.094 17.536,16.575 16.036,16.575 ; R21.2 22.55,4.44 22.575,4.415 R23.1@22.575,4.35 ; v1(19.7,11.3) 19.727,11.273 19.727,10.5 20.372,9.855 20.928,9.855 21.299,10.226 ; DD1.17 20.15,18.015 DD1.17@20.17,17.995 ; C13.1@21.271,4.588 20.93,4.929 20.93,5.735 21.025,5.83 U4.47 21.025,8.465 20.975,8.515 ; U4.8@22.025,11.9 21.939,11.9 21.581,11.543 21.581,10.509 21.299,10.226 ; C6.1 23.575,23.218 v1(23.575,23.225) ; 23.585,18.758 27.127,18.758 27.685,18.2 v1(27.7,18.2) 27.738,18.162 28.563,18.162 C2.1@28.65,18.075 ; v1(24.048,21.48) 24.124,21.404 24.823,21.404 25.545,20.682 C1.1 ; C12.1@25.015,4.744 25.015,4.838 25.127,4.95 25.331,4.95 25.731,5.35 v1(25.775,5.35) ; C1.1@25.475,20.7 25.575,20.6 U1.2 ; 25.55,9.75 27.417,9.75 27.767,9.4 v1(27.875,9.4) ; C11.1 25.707,12.88 25.827,13 26.017,13 26.492,13.475 v1(26.6,13.475) 26.385,13.69 25.795,13.69 R26.1 ; v1@28.525,16.4 28.55,16.425 v1(28.575,16.425) ; J2.6 29.575,1.7 v1(29.575,1.505) ; U1.8 30.075,21.25 30.305,21.48 30.305,21.572 30.806,22.073 v1(30.806,22.181) ; CAN1.SH2@32.975,26.4 32.975,25.85 33.3,25.525 33.35,25.525 34.8,24.075 CAN1.4 ; v1(40.125,16.55) 40.15,16.525 CAN3.6 ; 20.975,8.515 21.2,8.515 21.593,8.907 21.593,9.932 21.299,10.226
  Bottom Layer w0.3: J1.SH3@5.2,16.8 5.375,16.975 7.725,16.975 v1@11.1,20.35 ; v1(11.475,15.575) 11.525,15.625 11.525,16 12.1,16.575 v1(14.125,16.575) ; v1(19.7,11.3) 19.638,11.362 19.638,11.611 21.072,13.045 23.272,13.045 23.702,13.475 v1(26.6,13.475) ; v1(23.575,23.225) 23.575,25.967 v1@23.725,26.117 ; v1@23.775,26.225 23.775,26.167 v1@23.725,26.117 ; v1(24.048,21.48) 24.048,25.794 v1@23.725,26.117 ; v1(25.775,5.35) 25.698,5.273 25.698,4.994 25.656,4.952 25.656,4.378 26.029,4.004 26.603,4.004 26.754,4.155 26.849,4.155 27.875,5.181 v1(27.875,9.4) ; v1(27.7,18.2) 28.575,17.325 v1(28.575,16.425) ; v1@28.475,16.3 28.558,16.3 28.808,16.55 v1(40.125,16.55) ; v1(29.575,1.505) 29.575,-0.172 29.8,-0.397 v1(29.8,-2.075) ; v1(30.806,22.181) 31.905,23.28 34.051,23.28 34.566,23.795 36.489,23.795 36.929,23.355 40.255,23.355 40.575,23.675 40.575,26.175 v1(40.525,26.225)
  other v1: 3.675,-1 11.175,-1 23.675,-1 26.175,-1 28.675,-1 31.175,-1 33.675,-1 36.175,-1 38.675,-1 41.175,-1 43.675,-1 46.175,-1 2.425,1.5 4.925,1.5 29.925,1.5 39.925,1.5 42.425,1.5 44.925,1.5 47.425,1.5 -1.325,4 1.175,4 13.675,4 18.675,4 21.175,4 31.175,4 33.675,4 41.175,4 43.675,4 46.175,4 -0.075,6.5 34.925,6.5 37.425,6.5 1.175,9 16.175,9 26.175,9 28.675,9 31.175,9 -0.075,11.5 2.425,11.5 17.425,11.5 19.925,11.5 27.425,11.5 29.925,11.5 32.425,11.5 44.925,11.5 47.425,11.5 -1.325,14 1.175,14 3.675,14 -0.075,16.5 2.425,16.5 12.425,16.5 14.925,16.5 29.925,16.5 32.425,16.5 37.425,16.5 39.925,16.5 -1.325,19 41.175,19 -0.075,21.5 2.425,21.5 7.425,21.5 17.425,21.5 39.925,21.5 42.425,21.5 44.925,21.5 47.425,21.5 3.675,24 8.675,24 11.175,24 16.175,24 41.175,24 43.675,24 46.175,24 23.725,26.225 2.425,26.5 22.425,26.5 24.925,26.5 27.425,26.5 29.925,26.5 32.425,26.5 34.925,26.5 37.425,26.5 39.925,26.5 42.425,26.5 44.925,26.5 47.425,26.5
IP0: J1.A5 R4.1 | length 8.6
  Top Layer w0.17: J1.A5 7.995,13.38 8.55,12.825 v1(8.55,12.225) ; v1@7.531,7.985 v1(7.473,7.927) 7.574,7.826 7.574,7.536 7.975,7.135 R4.1@7.975,7.125
  Bottom Layer w0.17: v1(7.473,7.927) 7.528,7.927 7.928,8.327 8.251,8.327 8.55,8.626 v1(8.55,12.225)
IP1: J1.B5 R8.1 | length 9.8
  Top Layer w0.17: v1@6.501,6.775 v1(6.425,6.775) 6.935,6.265 7.92,6.265 7.975,6.21 R8.1@7.975,6.025
  Bottom Layer w0.17: J1.B5@4.825,11.775 4.82,11.775 3.57,10.525 3.57,7.855 4.65,6.775 v1(6.425,6.775)
LED: DD1.11 R6.1 | length 13.5
  Top Layer w0.2: DD1.11 17.18,18.355 17.18,17.78 v1@18.18,16.78 ; v1@18.192,16.767 18.192,16.792 v1(18.23,16.83) ; v1(26.655,15.351) 26.655,14.555 27.4,13.81 R6.1@27.4,13.75 ; R6.1@27.43,13.78 R6.1@27.55,13.66
  Bottom Layer w0.2: v1(18.23,16.83) 18.734,16.325 20.375,16.325 20.49,16.21 21.31,16.21 21.425,16.325 25.95,16.325 26.255,16.02 26.255,15.87 26.655,15.469 v1(26.655,15.351)
LED_BLUE: DD1.12 R7.1 | length 12.6
  Top Layer w0.2: DD1.12@17.65,18.5 17.68,18.47 17.68,17.803 18.034,17.45 18.587,17.45 v1(19.092,16.945) ; R7.1 v1(27.54,15.61)
  Bottom Layer w0.2: v1(19.092,16.945) 19.092,16.842 19.209,16.725 20.498,16.725 20.643,16.58 21.157,16.58 21.302,16.725 26.425,16.725 v1(27.54,15.61)
LED_STLINK: R5.1 U4.30 | length 15.7
  Top Layer w0.2: U4.30@15.275,11.4 15.312,11.363 16.337,11.363 v1(16.35,11.35) ; v1(26.7,12.475) 27.465,12.475 R5.1
  Bottom Layer w0.2: v1(16.35,11.35) 16.375,11.35 17.197,12.172 17.197,12.274 19.018,14.095 26.857,14.095 27.22,13.732 27.22,13.218 27.074,13.072 27.074,12.984 26.7,12.61 v1(26.7,12.475)
Net3V3-SNIFFER_A: 3V3-SNIFFER.A R9.2 | length 1.5
  Top Layer w0.3: 3V3-SNIFFER.A 1.275,19.6 2.725,19.6 R9.2@2.75,19.575
NetDD1_2: DD1.2 Y1.1 | length 3
  Top Layer w0.2: Y1.1 13.875,23.65 14.825,22.7 15.625,22.7 DD1.2@15.65,22.725
NetDD1_3: DD1.3 Y1.3 | length 3
  Top Layer w0.2: Y1.3 14.275,21.25 15.195,22.17 15.57,22.17 DD1.3@15.625,22.225
NetLED1_1: LED1.1 R5.2 | length 2.8
  Top Layer w0.2: R5.2 29.168,12.55 29.363,12.355 30.237,12.355 30.475,12.593 30.475,12.725 30.75,13 LED1.1@30.775,13
NetLED1_2: LED1.2 R6.2 | length 1.7
  Top Layer w0.2: R6.2@28.45,13.7 28.45,13.59 28.59,13.45 29.4,13.45 29.475,13.375 29.575,13.375 29.8,13.15 LED1.2
NetLED1_3: LED1.3 R7.2 | length 1.5
  Top Layer w0.2: R7.2@28.425,14.675 28.425,14.665 28.59,14.5 LED1.3
NetR21_1: R21.1 U4.44 | length 1.8
  Top Layer w0.3: R21.1@19.475,5.25 19.517,5.292 19.517,7.067 U4.44
NetR22_1: R22.1 U4.2 | length 4.1
  Top Layer w0.2: U4.2@23.109,8.859 23.622,8.859 23.693,8.787 23.754,8.787 23.995,8.546 23.995,8.424 24.362,8.057 24.362,7.014 23.995,6.647 R22.1@23.995,5.775
NetR23_2: R23.2 U4.3 | length 6.3
  Top Layer w0.17: R23.2@22.75,5.3 22.915,5.465 22.915,7.19 v1(23.372,7.647) ; U4.3 24.125,9.375 v1(24.5,9)
  Bottom Layer w0.17: v1(23.372,7.647) 23.372,7.872 v1(24.5,9)
NetR27_1: R27.1 TVS1.4 | length 1.7
  Top Layer w0.2: TVS1.4 7.026,2.805 7.527,2.805 7.598,2.734 8.584,2.734 R27.1@8.625,2.775
NetR28_1: R28.1 R29.1 TVS1.6 | length 2.7
  Top Layer w0.3: TVS1.6@7.25,3.858 7.417,4.024 8.511,4.024 8.665,3.87 R28.1 ; R29.1 8.64,4.925 8.64,3.885 R28.1@8.67,3.855
NetR30_2: R30.2 VUSB.A | length 1.6
  Top Layer w0.3: VUSB.A 1.012,6.112 2.587,6.112 R30.2@2.6,6.125
NetU4_5: U4.5 Y2.1 | length 4.1
  Top Layer w0.2: U4.5@22.95,10.325 23.9,10.325 24.605,9.62 24.757,9.62 25.12,9.257 25.12,9.105 25.625,8.6 25.625,8.325 25.65,8.3 Y2.1@25.925,8.3
NetU4_6: U4.6 Y2.3 | length 3.1
  Top Layer w0.2: U4.6 24.205,10.875 24.295,10.785 25.385,10.785 25.475,10.875 25.88,10.875
NRST: DD1.4 R3.2 | length 3.6
  Top Layer w0.2: R3.2 12.69,20.22 13.01,20.54 13.01,20.612 13.178,20.78 14.328,20.78 15.218,21.67 15.545,21.67 DD1.4@15.6,21.725
RX1/C1: DD1.22 R11.2 | length 4.9
  Top Layer w0.2: DD1.22@21.45,20.725 21.505,20.67 22.047,20.67 23.165,19.552 23.165,18.584 23.411,18.338 24.027,18.338 24.15,18.215 R11.2
RX2/B1: DD1.10
SCL/A2: DD1.33
SDA/A1: DD1.34
SPI1_MISO: DD1.31
SPI1_MOSI: DD1.32
SPI1_SCK: DD1.30
SPI1_SS: DD1.29
STLINK_RX: R10.1 U4.13 | length 2.4
  Top Layer w0.17: U4.13@21.55,15.275 21.55,15.82 21.578,15.848 22.188,15.848 23.055,16.715 R10.1
STLINK_TX: R11.1 U4.12 | length 3.9
  Top Layer w0.17: U4.12 23.583,13.875 24.15,14.442 R11.1
STM_RST: C11.2 R24.2 U4.7 | length 4.7
  Top Layer w0.2: U4.7 24.228,11.375 24.448,11.155 25.232,11.155 25.53,11.453 25.53,11.555 R24.2@25.705,11.73 ; C11.2 24.843,12.82 25.167,12.496 25.167,12.36 25.39,12.137 25.39,12.065 25.63,11.825 R24.2@25.7,11.825
SWDIO: DD1.25 SWD1.3 | length 24.4
  Top Layer w0.17: SWD1.3 7.42,27.12 20.805,27.12 24.275,23.65 24.275,22.987 23.881,22.594 23.641,22.594 23.247,22.2 DD1.25@21.525,22.2
SWDIO_IN: R18.1 U4.25 | length 2.4
  Top Layer w0.2: R18.1 12.115,13.12 12.435,13.44 12.435,13.512 12.798,13.875 U4.25@14.1,13.875
SWDIO_p: SWD2.3 U4.34 | length 14.1
  Top Layer w0.2: SWD2.3 8.636,1.311 8.983,1.311 11.865,4.193 11.865,7.601 11.5,7.966 11.5,8.634 12.241,9.375 14.45,9.375 U4.34@14.475,9.35
SWLK: DD1.28 SWD1.2 | length 15.9
  Top Layer w0.17: SWD1.2 8.33,26.78 19.345,26.78 20.65,25.475 DD1.28@20.65,24.275
SWLK_p: SWD2.2 U4.37 | length 15.3
  Top Layer w0.2: v1(15.075,5.7) 15.171,5.796 15.171,6.169 15.418,6.417 15.986,6.417 16,6.431 U4.37@16,7.25
  Bottom Layer w0.2: SWD2.2 6.15,0.575 7.425,1.85 13.725,1.85 15.075,3.2 v1(15.075,5.7)
T3CH1/ADC6: DD1.13
T3CH2/ADC7: DD1.14
T3CH3/ADC8: DD1.15
T3CH4/ADC9: DD1.16
T_JTCK: R16.1 U4.15 U4.26 | length 22.2
  Top Layer w0.2: U4.15@20.525,15.05 20.525,12.638 20.65,12.513 v1(20.65,10.525) ; v1(26.625,5.537) 27.338,5.537 R16.1@27.4,5.475
  Top Layer w0.3: U4.26 17.05,13.375 18.075,12.35 18.1,12.35 v1(18.125,12.325)
  Bottom Layer w0.2: v1(20.65,10.525) 20.558,10.433 20.15,10.025 20.15,9.081 22.09,7.14 22.375,7.14 23.545,5.97 26.138,5.97 26.57,5.537 v1(26.625,5.537)
  Bottom Layer w0.3: v1(18.125,12.325) 18.812,11.638 18.812,11.24 19.527,10.525 20.465,10.525 v1@20.525,10.465
T_JTMS: R17.1 R18.2 U4.27 | length 2.8
  Top Layer w0.2: R17.1 12.09,12.02 12.41,12.34 12.41,12.412 12.805,12.807 12.805,12.9 12.955,13.05 R18.2@13.025,13.05 ; R18.2 13.565,13.1 13.774,12.891 14.191,12.891 U4.27@14.2,12.9
T_NRST: "TARGET SWD1.5" R19.2 | length 21.4
  Top Layer w0.3: R19.2 31.825,6.3 34.1,8.575 36.75,8.575 v1@36.775,8.55 ; v1@36.775,8.575 v1(36.825,8.575)
  Bottom Layer w0.3: v1(36.825,8.575) 36.825,8.868 44.162,16.205 45.4,16.205
T_NRST_OUT: R19.1 U4.18 | length 14.8
  Top Layer w0.2: U4.18 19.025,10.609 20.388,9.246 20.862,9.246 v1(20.923,9.185) ; v1(26.607,6.407) 27.408,6.407 R19.1@27.475,6.34
  Bottom Layer w0.2: v1(20.923,9.185) 23.718,6.39 26.59,6.39 v1(26.607,6.407)
T_SWCLK: "TARGET SWD1.2" "TARGET SWD.3" J2.5 R16.2 | length 25.8
  Top Layer w0.2: J2.5@28.6,2.25 29.67,3.32 29.67,3.768 29.77,3.868 29.77,4.382 29.407,4.745 29.265,4.745 29.215,4.795 28.92,4.795 28.35,5.365 28.35,5.515 34.437,5.515 36.628,3.323 36.628,2.622 37.225,2.025 ; 37.225,1.475 37.225,2.025 ; v1(41.775,7.4) 37.225,2.85 37.225,2.025
  Bottom Layer w0.2: v1(41.775,7.4) 42.298,7.923 43.5,7.923 43.975,8.398 43.975,8.4
T_SWDIO: "TARGET SWD1.4" "TARGET SWD.2" J2.4 R17.2 | length 46.4
  Top Layer w0.3: v1(12.919,11.987) 12.933,12 R17.2 ; v1(27.5,3.25) 27.546,3.204 27.546,2.45 27.75,2.246 J2.4@27.75,1.6 ; J2.4@27.55,0.975 28.22,0.305 35.355,0.305 35.975,0.925 35.975,1.475 ; v1(35.975,3.1) 35.975,1.925 36.075,1.825
  Bottom Layer w0.3: v1(12.919,11.987) 14.281,10.625 17.9,10.625 21.906,6.619 22.302,6.619 26.091,2.83 26.972,2.83 27.392,3.25 v1(27.5,3.25) ; v1(35.975,3.1) 35.975,3.208 36.3,3.533 36.3,3.6 39.825,7.125 39.825,9.328 44.162,13.665 45.4,13.665
T_SWO: "TARGET SWD1.6" R20.2 | length 37.4
  Bottom Layer w0.3: v1(12.075,10.8) 12.075,12.09 14.5,14.515 39.932,14.515 44.162,18.745 45.4,18.745
T_SWO_OUT: R20.1 U4.31 | length 1.2
  Top Layer w0.2: R20.1 13.894,10.825 13.944,10.875 U4.31@14.175,10.875
TX1/C2: DD1.20 DD1.21 R10.2 | length 4
  Top Layer w0.2: DD1.20 21.495,19.67 22.047,19.67 ; DD1.21 21.875,20.2 22.175,19.9 22.175,19.675 22.795,19.055 22.795,18.431 22.875,18.351 22.875,17.75 R10.2@23,17.625
TX2/B2: DD1.7 DD1.9 | length 2
  Top Layer w0.2: DD1.7@15.5,20.225 15.445,20.17 15.253,20.17 15.025,19.942 15.025,19.458 15.253,19.23 15.805,19.23 DD1.9
USB_DM: R27.2 U4.32 | length 13
  Top Layer w0.2: R27.2 9.535,2.845 11.4,4.71 11.4,5.882 11.245,6.037 v1(11.245,7.345) ; U4.32@15.125,10.375 15.141,10.359 15.86,10.359 16.263,9.955 v1(16.375,9.955)
  Bottom Layer w0.2: v1(11.245,7.345) 13.855,9.955 v1(16.375,9.955)
USB_DP: R28.2 U4.33 | length 9.7
  Top Layer w0.2: R28.2 9.535,3.87 10.625,4.96 10.625,8.5 12.05,9.925 U4.33@14.65,9.925
VBUS: C1.2 C7.2 C9.2 C16.2 CAN1.1 CAN2.1 D1.C D2.A J1.A4 J1.A9 J1.B4 J1.B9 R30.1 TVS1.5 U1.3 U2.1 U2.3 U3.1 U3.3 U5.1 U5.3 | length 103.7
  Top Layer w0.2: 4.525,6.175 4.702,6.175 ; TVS1.5 7.85,3.35 v1(7.855,3.354) ; U2.3@12.584,-0.809 U2.3 ; U2.1 13.346,1.07 13.737,0.68 13.896,0.522 13.896,-0.261 13.526,-0.63 13.495,-0.63 U2.3@13.325,-0.8 ; v1(17.2,2.15) 17.2,2.175 v1@17.225,2.2 ; U5.3@18.301,-0.815 U5.3 ; U5.1 19.063,1.065 19.453,0.674 19.612,0.516 19.612,-0.266 19.243,-0.635 19.09,-0.635 U5.3@19,-0.725
  Top Layer w0.3: J1.B4 6.325,11.43 6.355,11.4 J1.A9@6.575,11.4 ; J1.B9 5.615,13.87 J1.A4@6.82,13.87 ; J1.A9 9.375,11.38 D1.C@9.472,11.478 ; J1.A4 8.068,13.88 8.905,13.043 8.905,13.04 D1.C@9.725,12.22 ; D1.C@9.575,10.95 9.575,11.26 D1.C@9.575,11.375 ; D1.C@9.7,11.8 D1.C@9.7,12.125 ; C1.2@25.737,19.95 U1.3
  Top Layer w0.4: R30.1 4.525,6.125 ; v1(6.9,4.775) 5.5,6.175 4.702,6.175 9.327,10.8 9.425,10.8 D1.C@9.477,10.852 ; D1.C@9.477,11.162 9.575,11.26 D1.C ; v1@11.75,2.625 v1@11.8,2.625 ; v1@11.8,1.075 v1@11.8,2.625 ; v1(11.8,2.65) v1@11.8,2.625 ; C7.2@12.5,2.298 12.173,2.625 v1@11.8,2.625 ; C7.2 12.518,1.107 U2.1@12.525,1.1 ; v1@17.225,2.175 C16.2@18.218,2.175 ; C16.2 C16.2@18.218,2.175 ; C16.2@18.225,2.175 C16.2@18.218,2.175 ; U5.1@18.35,1.15 18.218,1.282 C16.2@18.218,2.175
  Top Layer w0.5: U3.1@6.275,19.7 6.182,19.793 C9.2 5.225,18.425 8,15.65 8,13.9 ; U3.1@6.325,19.6 6.325,19.423 6.922,18.826 7.828,18.826 8.074,19.072 8.074,19.285 8.315,19.526 U3.3 ; v1(24.675,20.4) 24.693,20.4 25.218,19.875 C1.2@25.45,19.875 ; v1(29.275,24.775) 29.3,24.75 29.3,23.675 CAN2.1@29.35,23.625 ; D2.A@38.45,19.65 38.55,19.75 CAN1.1
  Bottom Layer w0.4: v1(6.9,4.775) 9.025,2.65 v1(11.8,2.65) ; v1(11.75,1.025) 16.966,1.025 17.2,1.259 v1(17.2,2.15)
  Bottom Layer w0.5: v1(10,11.8) 10,17.439 12.331,19.77 17.971,19.77 19.376,21.175 23.264,21.175 24.001,20.438 v1@24.713,20.438 ; 24.713,20.774 24.818,20.879 24.818,22.256 27.336,24.775 v1(29.275,24.775) 30.2,23.85 33.815,23.85 34.33,24.365 36.725,24.365 37.065,24.025 v1(38.575,24.025)
Vin: CAN3.1 CAN3.2 D2.C | length 14.2
  Top Layer w1: D2.C 34.485,13.14 37.775,9.85 40.875,9.85 40.925,9.8
"WAKE UP": R25.2 R26.2 U4.10 | length 3.1
  Top Layer w0.2: U4.10@23.05,12.85 23.091,12.891 23.932,12.891 24.461,13.42 24.505,13.42 R26.2@24.84,13.755 ; R26.2@24.825,13.725 24.84,13.74 R26.2@24.84,13.755 ; R25.2 R26.2 R26.2@24.84,13.755
pads on no net: J1. J1.A2 J1.A3 J1.A8 J1.A10 J1.A11 J1.B2 J1.B3 J1.B8 J1.B10 J1.B11 U2.4 U3.4 U4.4 U4.11 U4.14 U4.16 U4.17 U4.19 U4.21 U4.22 U4.28 U4.29 U4.38 U4.39 U4.40 U4.41 U4.42 U4.43 U4.45 U4.46 U5.4

## Polygon pours and split planes (outlines as drawn)
GND on Bottom Layer "GND_L02_P019" (solid, pour order 19): -2.95,30.9 45.975,30.9 50.225,26.65 50.225,-2.075 46.075,-6.225 -0.075,-6.225 -5.575,-0.725 -5.575,27.5
GND on Top Layer "GND_L01_P020" (solid, pour order 20): -3.55,31.575 46.025,31.575 50.625,26.975 50.625,-1.275 45.9,-6 -1.525,-6 -6.975,-0.55 -6.925,-0.5 -6.925,27.725

## Silkscreen, mask and mechanical layers (free items; w line width, h text height)
Top Overlay:
  lines w0.2: -2.4,-0.85 -0.675,-2.575 46,-2.575 47.55,-1.025 47.55,25.85 45.675,27.725 -0.925,27.725 -2.4,26.25 -2.4,-0.85
  text "GND / CAN_L / CAN_H / Vusb" at 47.5,20.275 h1 r90
  text "+" at 30.75,15 h0.75
  text "R - SWD / G - BLINK / B - CAN" at 31.925,7.85 h0.75
  text "GND / SWCLK / SWDIO / 3V3" at 39.4,4.7 h1 r270
Bottom Overlay:
  lines w0.6: -2.425,10.75 0.9,10.75 1.75,11.6 1.8,11.6 ; -2.325,13.35 0.8,13.35 1.575,12.575 1.575,12.525 ; 1.575,12.6 26.95,12.6 31.675,17.325 31.675,27.05 32.45,26.275 32.45,24.75 ; 1.7,11.525 26.975,11.525 31.675,6.825 31.675,0.1 32.4,0.825 32.4,3.025 ; 28.875,11.575 30.65,11.575 ; 32.2,11.6 38.45,11.6 37.725,10.875 36.525,10.875
  text "CAN        CAN" at 23.675,27.95 h1 r180
  text "3V3 /  /  / GND" at 8.725,25.8 h0.7 r90
  text "3V3 /  / SWCLK /  / GND /  / SWDIO /  / NRST /  / SWO" at 37.95,19.3 h0.7 r180
  text "V '.Version'" at 7.425,16.7 h1 r180
  text "ST-LINK V2.1 PROG /  /  / CAN SNIFFER" at 9.275,14.3 h2 r180
  text "USB" at -2.075,12.6 h0.8 r180
  text "TARGET SWD" at 26.25,-0.925 h1 r180
  text "3V3 /  /  / GND" at 4.45,-5.45 h0.7 r270
Top Solder:
  rectangle: 6.35,2.65 7.45,3.9
  rectangle: 4.75,2.65 5.85,3.875
  rectangle: 16.05,6.2 21.55,7.95
  rectangle: 21.95,8.35 23.725,13.875
  rectangle: 16.1,14.3 21.55,16.05
  rectangle: 13.85,8.425 15.6,13.875
  rectangle: 6.475,9.975 7.275,15.4
  rectangle: 20.875,19.225 22.05,23.2
  rectangle: 16.675,17.8 20.625,18.975
  rectangle: 15.25,19.225 16.425,23.2
  rectangle: 16.65,23.425 20.65,24.6
  rectangle: 17.225,19.85 20.075,22.625
Mechanical 2:
  lines w0.2: -3.4,-1.45 -3.4,26.475 -1.45,28.425 46.4,28.425 48.475,26.35 48.475,-1.425 46.45,-3.45 -1.4,-3.45 -3.4,-1.45
  lines w0.254: 42.776,22.25 42.776,22.251

## Text inside footprints (layer, text, board x,y; h text height)
J1: Mechanical 13 "PCB EDGE" at -4.346,7.616 h0.8 r270